# Altium PCB pcb.PcbDoc
Units mil, origin at the board's own origin, x right, y up, seen from the top; angles counter-clockwise.
Board outline 6000 x 4000 mil, 2 copper layers (Top Layer, Bottom Layer); 21 components, 35 nets, 121 pads, 11 vias.
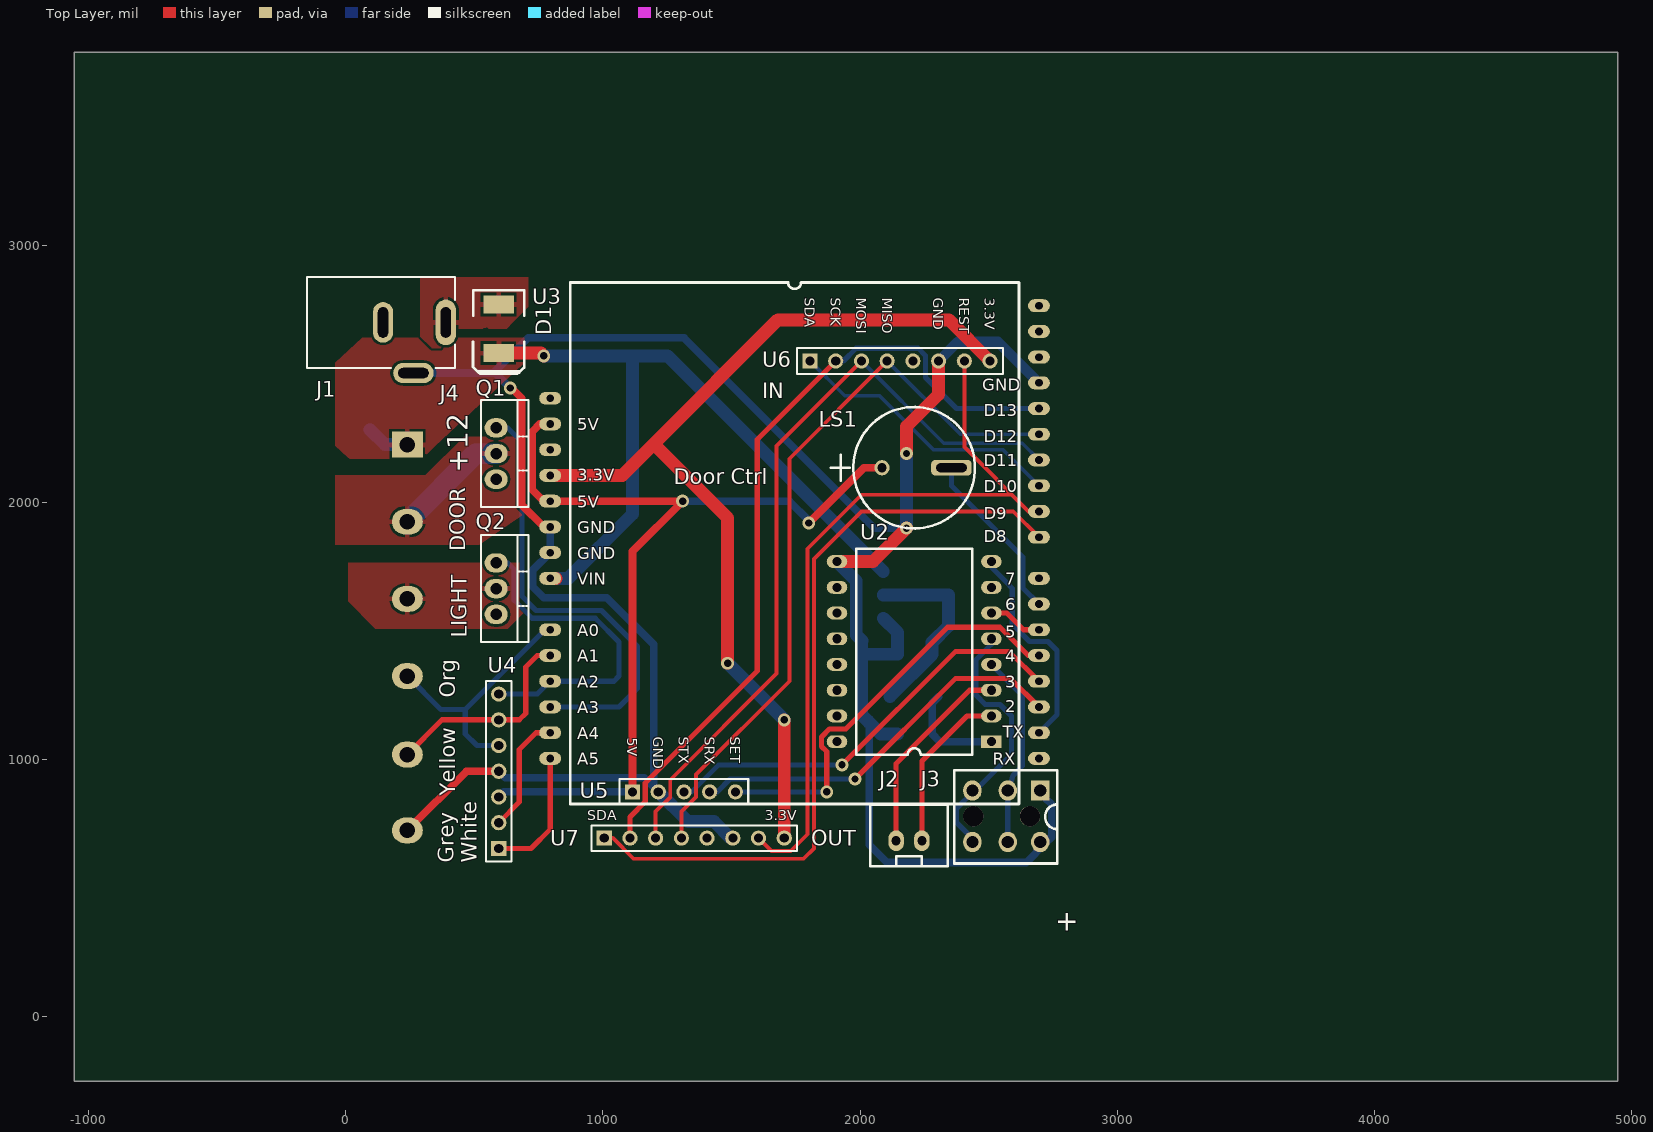
[diagram p0: Top Layer view]
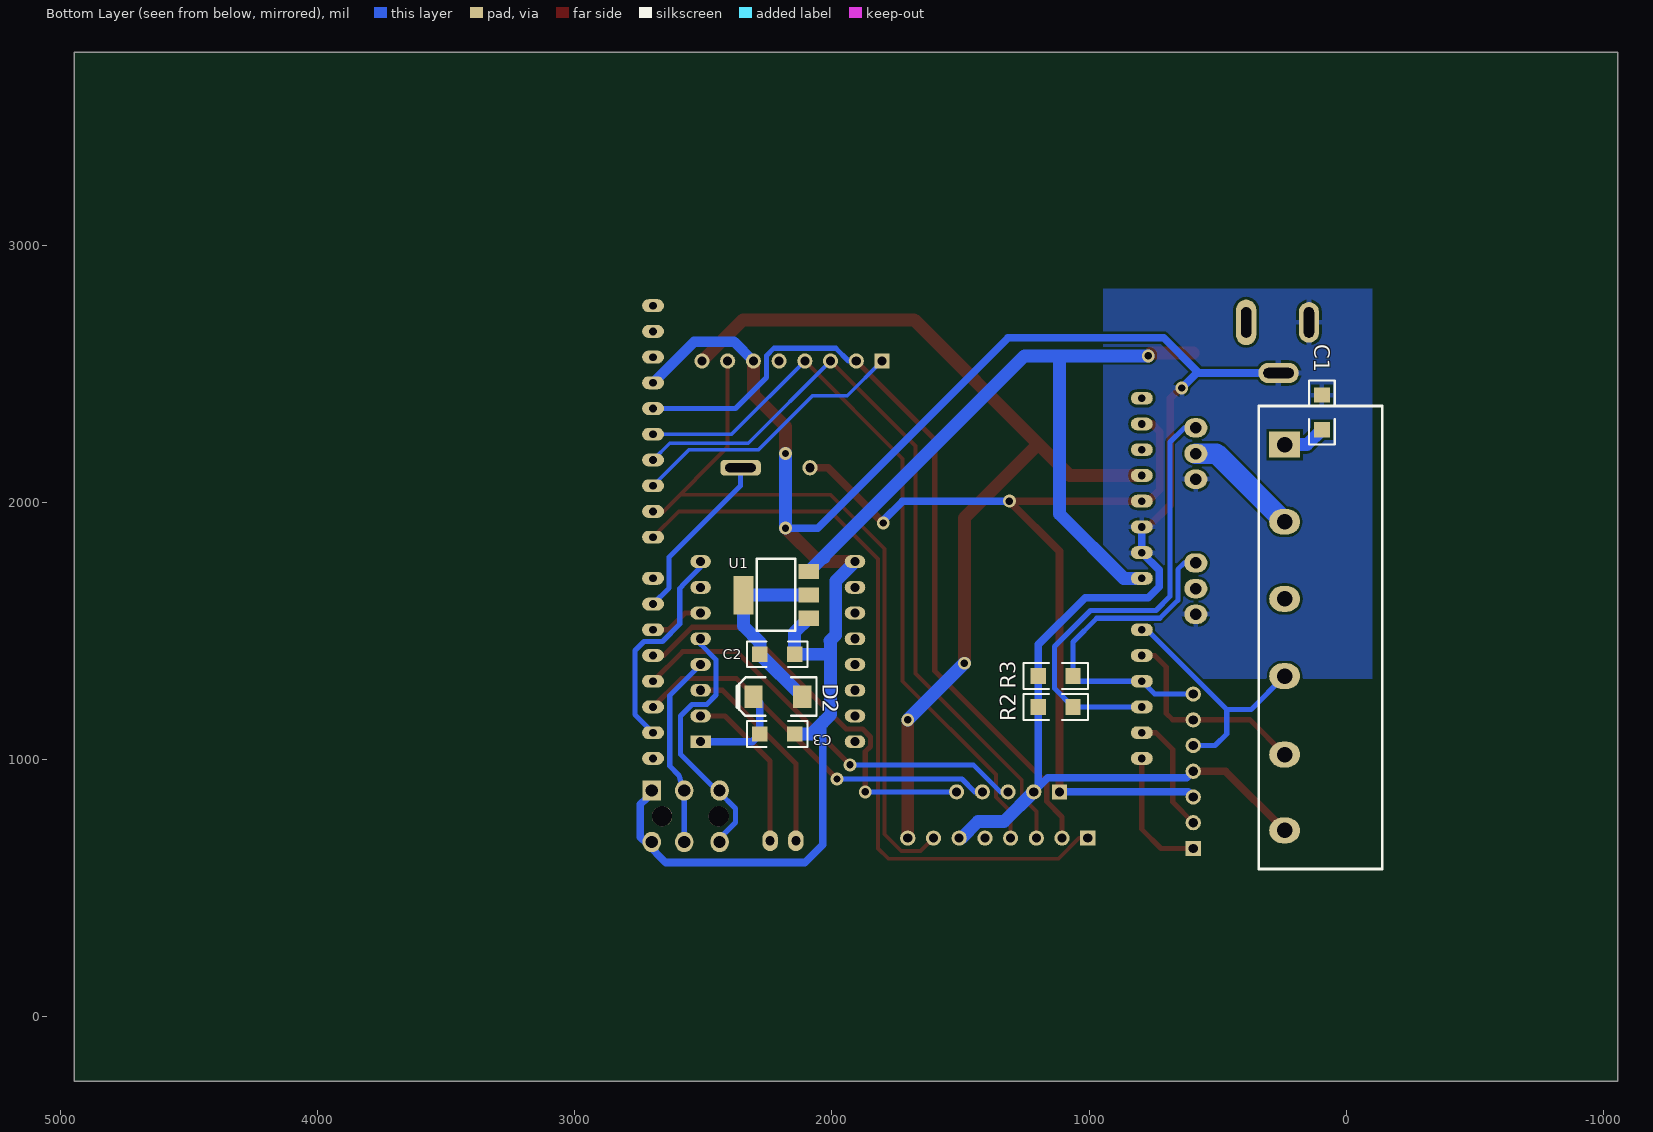
[diagram p1: Bottom Layer view, seen from below]

## Layer stack, top to bottom
Top Solder: solder mask 0.4, Solder Resist, Dk 3.5
Top Layer: signal copper 1.4
Dielectric 1: dielectric 12.6, FR-4, Dk 4.8
Bottom Layer: signal copper 1.4
Bottom Solder: solder mask 0.4, Solder Resist, Dk 3.5

## Board outline
-1055,-250 4945,-250 4945,3750 -1055,3750

## Design rules (kind name [scope] priority, off if disabled: settings)
Clearance Clearance_AC [(InNet('COM') OR InNet('NO') OR InNet('NC'))] p1: gap=30
Clearance [All] p2: gap=10
ComponentClearance ComponentClearance_1 [(InComponent('U3') OR InComponent('U7'))] p1: gap=0 collisioncheckmode=3 verticalgap=0 showdistances=TRUE
ComponentClearance [All] p2: gap=10 collisioncheckmode=3 verticalgap=10 showdistances=TRUE
HoleSize [All] p1: absolutevalues=TRUE maxlimit=200 minlimit=1 maxpercent=80.000 minpercent=20.000
PlaneConnect [All] p1: planeconnectstyle=Relief reliefexpansion=20 reliefentries=4 reliefconductorwidth=20 reliefairgap=20
PolygonConnect [All] p1: connectstyle=Relief reliefconductorwidth=20 reliefentries=4 polygonreliefangle="90 Angle" airgapwidth=10
RoutingVias [All] p1: holewidth=28 width=50 viastyle="Through Hole" minholewidth=28 minwidth=50 maxholewidth=28 maxwidth=50
SilkToSolderMaskClearance [IsPad] p1: minsilkscreentomaskgap=5 clearancetoexposedcopper=TRUE
SolderMaskExpansion [All] p1: expansion=4
Width [All] p1: maxlimit=196.85 minlimit=10 preferedwidth=10
25 further rules are at their usual default settings.

## Components (designator, comment, footprint, x,y, rotation, side; value= is the part's Value field where it differs from the comment)
C1 "" 1206#1 95,2350 r270 bottom
C2 "Cap Semi" 1206#2 2145,1410 r0 bottom
C3 "Cap Semi" 1206#2 2145,1100 r0 bottom
D1 "SS24" SMB 595,2675 r270 top
D2 "M7" SMA 2210,1245 r0 bottom
J1 "PWR2.5" KLD-0202_new -150,2700 r0 top
J2 "SPK" DG1282 2040,325 r0 top
J3 "earphone_jack" Phone-Jack 2700,880 r270 top
J4 "CON6" "POWER CONN6" 240,2225 r270 top
LS1 "Buzzer" BUZZ 2085,2135 r0 top
Q1 "IRF510" TO-220 585,2190 r270 top
Q2 "IRF510" TO-220 585,1665 r270 top
R2 "10k" 1206#1 1130,1205 r0 bottom
R3 "10k" 1206#1 1130,1325 r0 bottom
U1 "REG1117-5V" SOT223 2090,1550 r90 bottom
U2 "MP3" MP3 2510,1070 r180 top
U3 "Uno_part" UNO 795,1005 r0 top
U4 "ADDR_SET" HDR1X7 595,655 r90 top
U5 "WireLess433" HDR1X5 1115,875 r0 top
U6 "RC522" HDR1X8 1805,2550 r0 top
U7 "RC522" HDR1X8 1005,695 r0 top

## Footprints (in the part's own frame and the unit in brackets; to place one, negate y for a bottom-side part, rotate by r counter-clockwise, add the part's x,y. Pads: shape width x height; smd on the part's side, far side on the other; paste and mask are expansions set on the pad)
1206#1 [mm]
  rect 1.5x1.6 smd: 1(-1.71,0) 2(1.71,0)
  silkscreen extent -3.18,-1.27 3.18,1.27
1206#2 [mm]
  rect 1.524x1.524 smd: 1(0,0) 2(3.429,0)
  silkscreen extent -1.27,-1.27 4.7,1.27
BUZZ [mm] "6~8mm"
  round 1.5 hole 0.9: 1(0,0)
  rrect50% 4x1.524 hole 0.9 slot 3 at 0 deg: 2(6.858,0)
  silkscreen extent -5.08,-6 9.18,6
DG1282 [mil]
  oval 60x80 hole 35.43: 1(100,360) 2(200,360)
  silkscreen extent 0,260 300,500
HDR1X5 [mm] "Connector; Header; 5 Position"
  rect 1.5x1.5 hole 0.9: 1(0,0)
  round 1.5 hole 0.9: 2(2.54,0) 3(5.08,0) 4(7.62,0) 5(10.16,0)
  silkscreen extent -1.27,-1.27 11.43,1.27
HDR1X7 [mm] "Connector; Header; 7 Position"
  rect 1.5x1.5 hole 0.9: 1(0,0)
  round 1.5 hole 0.9: 2(2.54,0) 3(5.08,0) 4(7.62,0) 5(10.16,0) 6(12.7,0) 7(15.24,0)
  silkscreen extent -1.27,-1.27 16.51,1.27
HDR1X8 [mm] "Connector; Header; 8 Position"
  rect 1.5x1.5 hole 0.9: 1(0,0)
  round 1.5 hole 0.9: 2(2.54,0) 3(5.08,0) 4(7.62,0) 5(10.16,0) 6(12.7,0) 7(15.24,0) 8(17.78,0)
  silkscreen extent -1.27,-1.27 19.05,1.27
KLD-0202_new [mm] "DC Power Jack, 2.5mm, KLD Series, PCB Mount"
  oval 2x4.5 hole 1 slot 3 at 90 deg: 1(13.7,0)
  oval 2x4 hole 1 slot 3 at 90 deg: 2(7.5,0)
  oval 4x2 hole 1 slot 3 at 0 deg: 3(10.5,-5)
  silkscreen extent 0,-4.5 14.6,4.5
MP3 [mil]
  rect 80x50 hole 35.43: 1(0,0)
  oval 80x50 hole 35.43: 2(0,-100) 3(0,-200) 4(0,-300) 5(0,-400) 6(0,-500) 7(0,-600) 8(0,-700) 9(600,-700) 10(600,-600) 11(600,-500) 12(600,-400) 13(600,-300) 14(600,-200) 15(600,-100) 16(600,0)
  silkscreen extent 75,-750 525,50
Phone-Jack [mm]
  round 2 hole 2: 0(2.54,-1.016) 0(2.54,-6.604)
  rect 2x1.8 hole 1.2: 1(0,0)
  oval 2x1.8 hole 1.2: 1(5.08,0) 2(0,-3.2) 2(5.08,-3.2) 3(0,-6.7) 3(5.08,-6.7)
  silkscreen extent -2,-8.5 7.2,1.7
"POWER CONN6" [mil]
  rect 100x120 hole 60: 1(0,0)
  oval 100x120 hole 60: 2(300,0) 3(600,0) 4(900,0) 5(1205,0) 6(1500,0)
SMA [mm]
  rect 1.8x2.2 smd: A(-2.4,0) K(2.4,0)
  silkscreen extent -3.81,-1.91 4.06,1.91
SMB [mm]
  rect 1.8x3 smd: A(-2.4,0) K(2.4,0)
  silkscreen extent -3.81,-2.54 4.44,2.54
SOT223 [mil]
  rect 59x79 smd: 1(0,0) 2(90.55,0) 3(181.1,0)
  rect 150x79 smd: 4(89.88,253.54)
  silkscreen extent -49,52 231,202
TO-220 [mil]
  oval 75x90 hole 45: 1(-100,0) 2(0,0) 3(100,0)
  silkscreen extent -208,-58 208,125
UNO [mil]
  oval 85x50 hole 30: 1(0,1400) 2(0,1300) 3(0,1200) 4(0,1100) 5(0,1000) 6(0,900) 7(0,800) 8(0,700) 9(0,500) 10(0,400) 11(0,300) 12(0,200) 13(0,100) 14(0,0) 15(1900,0) 16(1900,100) 17(1900,200) 18(1900,300) 19(1900,400) 20(1900,500) 21(1900,600) 22(1900,700) 23(1900,860) 24(1900,960) 25(1900,1060) 26(1900,1160) 27(1900,1260) 28(1900,1360) 29(1900,1460) 30(1900,1560) 31(1900,1660) 32(1900,1760)
  silkscreen extent 78,-177 1822,1850

## Part data
C1: library part "Cap Semi", "Capacitor (Semiconductor SIM Model)"
C2 C3: "Capacitor (Semiconductor SIM Model)"
D1 D2: library part "Diode 1N4001", "1 Amp General Purpose Rectifier"
J1: "Low Voltage Power Supply Connector"
J2: library part CON2
J3: library part "Header 3", "Header, 3-Pin"
J4: "Connector"
LS1: "Magnetic Transducer Buzzer"
Q1 Q2: "HEXFET N-Channel Power MOSFET"
R2 R3: library part RES1
U1: library part REG1117-2.85, "800mA and 1A Low Dropout Positive Regulator 2.85V, 3.3V, 5V, and Adjustable"

## Via types
v1: diameter 50, hole 28, Top Layer to Bottom Layer, 11 vias

## Nets (pads, with @x,y where several pads share a name; then routed paths per layer and width w, separated by ;. In a path a pad name is that pad's centre, name@x,y a point inside that pad or via, vN(x,y) a via of type N, cw(c..) or ccw(c..) an arc to the next point about the centre after c; other vN are vias at no path point)
3.3V: U3.4 U6.8 U7.8 | length 3769.6
  Top Layer w50: U3.4 1075,2105 1197.5,2227.5 ; v1(1485,1375) 1485,1940 1197.5,2227.5 ; U7.8 v1(1705,1155) ; U6.8 2345,2710 1680,2710 1197.5,2227.5
  Bottom Layer w50: v1(1485,1375) v1(1705,1155)
5V: LS1.1 U3.2 U3.5 U4.3 U5.1 | length 3545.2
  Top Layer w30: U3.2 755,2305 725,2275 725,2050 770,2005 U3.5 v1(1310,2005) 1115,1810 U5.1 ; v1(1800,1920) 2015,2135 LS1.1
  Bottom Layer w30: U4.3 615,875 905,875 U5.1 ; v1(1310,2005) 1725,2005 v1@1800,1930
12V: D1.A J1.1
A0: J4.4 U3.9 U4.5 | length 980.9
  Bottom Layer w20: J4.4 370,1195 464.96,1195 ; U4.5 510,1055 464.96,1100.04 464.96,1195 ; U3.9 774.96,1505 574.49,1304.53 464.96,1195
A1: J4.5 U3.10 U4.6 | length 819.9
  Top Layer w20: J4.5 375,1155 U4.6 675,1155 700,1180 700,1360 745,1405 U3.10
A2: Q2.1 R3.1 U3.11 U4.7 | length 1304.4
  Bottom Layer w20: Q2.1 630,1765 655,1740 655,1620 725,1550 970,1550 1062.68,1457.32 R3.1 1042.68,1305 U3.11 745,1255 U4.7
A3: Q1.1 R2.1 U3.12 | length 1786.2
  Bottom Layer w20: Q1.1 630,2290 685,2235 685,1635 740,1580 995,1580 1135,1440 1135,1277.32 R2.1 U3.12
A4: U3.13 U4.2 | length 465.1
  Top Layer w20: U4.2 675,835 675,1040 740,1105 U3.13
A5: U3.14 U4.1 | length 506.1
  Top Layer w20: U4.1 720,655 795,730 U3.14
D0: U3.15
D1: U2.8 U3.16 | length 841.3
  Bottom Layer w20: U2.8 2510,1748.64 2580,1678.64 2580,1677.57 2591.57,1666.01 2591.57,1527.29 2658.86,1460 2730,1460 2765,1425 2765,1175 U3.16
D2: U3.17 U5.4 | length 1508.5
  Top Layer w20: v1(1979.53,924.53) 2370,1315 2585,1315 U3.17
  Bottom Layer w20: U5.4 1444.96,875 1494.49,924.53 v1(1979.53,924.53) v1@1980,925
D3: U3.18 U5.3 | length 1653.4
  Top Layer w20: v1(1930,980) 2370,1420 2580,1420 U3.18
  Bottom Layer w20: U5.3 1344.96,875 1449.96,980 v1(1930,980)
D4: U3.19 U5.5 | length 1644.1
  Top Layer w20: v1(1870,875) 1870,1031.36 1850,1051.36 1850,1088.64 1881.36,1120 1945,1120 2340,1515 2543.64,1515 2653.64,1405 U3.19
  Bottom Layer w20: U5.5 v1(1870,875)
D5: U2.6 U3.20 | length 211.9
  Top Layer w20: U2.6 2570,1570 2635,1505 U3.20
D6: LS1.2 U3.21 | length 670.8
  Bottom Layer w20: LS1.2 2355,2065 2632.5,1787.5 2632.5,1667.5 U3.21
D7: U3.22
D8: U3.23 U7.1 | length 2982.8
  Top Layer w15: U7.1 1038.49,695 1118.49,615 1780,615 1820,655 1820,1780 2005,1965 2595,1965 U3.23
D9: U3.24 U6.7 U7.7 | length 3070.1
  Top Layer w15: U7.7@1625,695 U7.7 1655,645 1730,645 1795,710 1795,1820 2005,2030 2590,2030 U3.24@2655,1965 ; U6.7 2405,2215 U3.24@2655,1965 ; U3.24 U3.24@2655,1965
D10: U3.25 U6.1 | length 1090.9
  Bottom Layer w15: U6.1 1940,2415 2075,2415 2285,2205 2555,2205 U3.25
D11: U3.26 U6.3 U7.3 | length 3035.8
  Top Layer w15: U7.3 1205,798.49 1262.03,855.52 1262.03,922.03 1675,1335 1675,2220 U6.3
  Bottom Layer w15: U6.3 2325,2230 2630,2230 U3.26
D12: U3.27 U6.4 U7.4 | length 2894.4
  Top Layer w15: U7.4 1305,798.49 1362.03,855.52 1362.03,942.03 1725,1305 1725,2170 U6.4
  Bottom Layer w15: U6.4 2390,2265 U3.27
D13: U3.28 U6.2 U7.2 | length 3143.8
  Top Layer w20: U7.2 1105,777.66 1164.53,837.19 1164.53,909.53 1600,1345 1600,2245 U6.2
  Bottom Layer w20: U6.2 1934.96,2550 1984.49,2599.53 2225.52,2599.53 2254.53,2570.52 2254.53,2485.47 2375,2365 U3.28
DAC-L: J3.3 U2.5 | length 1060.5
  Bottom Layer w20: J3.3@2433.64,866.36 2588.64,1021.36 2588.64,1170 2543.64,1215 2486.36,1215 2450,1251.36 2450,1388.64 2510,1448.64 U2.5 ; J3.3@2456.22,675 2375,756.22 2375,810 2440,875 J3.3@2456.22,875
DAC-R: J3.2 U2.4 | length 762.7
  Bottom Layer w20: U2.4 2630,1250 2630,975 2594.02,939.02 2574.02,875 J3.2@2574.02,675
GND: C1.1 C2.1 C3.1 J1.2 J1.3 J3.1 J4.6 Q1.3 Q2.3 R2.2 R3.2 U1.1 U2.9 U3.6 U3.7 U3.29 U4.4 U5.2 U6.6 U7.6 | length 9899.9
  Top Layer w30: J4.6 470,955 U4.4 ; v1@640,2450 685,2405 685,1990 770,1905 U3.6
  Top Layer w50: U2.9 2050,1770 v1(2180,1900) ; v1(2180,2190) 2180,2295 2305,2420 U6.6
  Bottom Layer w30: J1.3 573.15,2503.15 710,2640 1315,2640 2055,1900 v1(2180,1900) ; 581.85,2503.15 v1(640,2445) ; U4.4 620,930 1160,930 U5.2@1197.32,892.68 ; U3.6 U3.7 727.5,1737.5 727.5,1672.5 770,1630 1015,1630 1197.32,1447.68 R3.2 R2.2 U5.2@1197.32,892.68 ; U5.2 U5.2@1197.32,892.68 ; 2030,1150 2035,1145 2035,740 2035,670 2105,600 2645,600 2720,675 2744.37,699.37 2744.37,826.03 2720,850.4 J3.1@2720,875
  Bottom Layer w40: U6.6 2380,2625 2535,2625 U3.29
  Bottom Layer w50: U5.2 1330.47,759.53 1431.73,759.53 1496.26,695 U7.6 ; U2.9 1910,1769.85 1985,1694.85 1985,1485 2007.5,1462.5 2005,1460 2005,1400 ; 2030,1150 2005,1175 2005,1400 ; 2035,1145 2080,1100 C3.1 ; U1.1 2145,1495 C2.1 2015,1410 2005,1400 ; v1(2180,1900) v1(2180,2190)
NetC2_2: C2.2 D2.A U1.2 U1.4 | length 743.2
  Bottom Layer w50: U1.2 2342.88,1640.55 U1.4 2343.54,1520 2280,1456.46 C2.2 2115.51,1245.51 D2.A
NetJ2_1: J2.1 U2.3 | length 788.1
  Top Layer w20: J2.1 2140,985 2425,1270 U2.3
NetJ2_2: J2.2 U2.2 | length 652.5
  Top Layer w20: J2.2 2240,995 2415,1170 U2.2
NetJ4_2: J4.2 Q1.2 | length 454.8
  Bottom Layer w80: J4.2 505,2190 Q1.2
NetJ4_3: J4.3 Q2.2
SCL: U3.32
SDA: U3.31
VCC_MP3: C3.2 D2.K U2.1 | length 397.6
  Bottom Layer w30: D2.K 2280,1220.51 C3.2 2310,1070 U2.1
VIN: C1.2 D1.K J4.1 U1.3 U3.8 | length 3077.5
  Top Layer w50: D1.K 759.49,2580.51 v1(770,2570) ; U3.8 U3.8@817.16,1705
  Bottom Layer w50: C1.2 152.68,2225 J4.1 ; v1(770,2570) 1251.1,2570 U1.3 ; U3.8 865,1705 1115,1955 1115,2565 ; 2030,1785 2036.1,1785
pads on no net: J3.0 U2.7 U2.10 U2.11 U2.12 U2.13 U2.14 U2.15 U2.16 U3.1 U3.3 U3.30 U6.5 U7.5

## Polygon pours and split planes (outlines as drawn)
NetJ4_2 on Top Layer "Top Layer-No Net" (solid, pour order 10): -40,1835 519.74,1835 637.02,1916.48 685,1949.81 685,2235 650,2255 460,2255 310,2105 -40,2105
NetJ4_3 on Top Layer "Top Layer-No Net" (solid, pour order 12): 10,1765 10,1615 110,1515 115,1510 580,1510 630,1510 690,1570 675,1585 675,1765
VIN on Top Layer "Top Layer-No Net" (solid, pour order 6): -40,2374.75 -40,2230.49 -40,2221.19 10,2174.65 15,2170 295,2170 345,2216.53 695,2542.28 695,2640 65,2640 -40,2542.28
12V on Top Layer "Top Layer-No Net" (solid, pour order 2): 290,2685 290,2810 290,2875 710,2875 710,2760 650,2700 625,2675 530,2675 495,2675 450,2630 420,2600 350,2600 335,2600 290,2645
GND on Bottom Layer "Top Layer-No Net" (solid, remove dead copper, pour order 16): -100,2830 -100,1315 730,1315 880,1465 945,1530 945,2830

## Silkscreen, mask and mechanical layers (free items; w line width, h text height)
Top Overlay:
  text "SDA" at 1785,2795 h40 r270
  text "SCK" at 1885,2795 h40 r270
  text "MOSI" at 1985,2795 h40 r270
  text "MISO" at 2085,2795 h40 r270
  text "GND" at 2285,2795 h40 r270
  text "REST" at 2385,2795 h40 r270
  text "3.3V" at 2485,2795 h40 r270
  text "IN" at 1620,2405 h60
  text "+12" at 475,2115 h80 r90
  text "Door Ctrl" at 1275,2070 h60
  text "DOOR" at 465,1810 h60 r90
  text "LIGHT" at 470,1475 h60 r90
  text "Org" at 425,1240 h60 r90
  text "GND" at 1195,1090 h40 r270
  text "STX" at 1295,1090 h40 r270
  text "SRX" at 1395,1090 h40 r270
  text "SET" at 1495,1090 h40 r270
  text "5V" at 1095,1085 h40 r270
  text "Yellow" at 425,860 h60 r90
  text "SDA" at 940,765 h40
  text "3.3V" at 1630,765 h40
  text "OUT" at 1810,665 h60
  text "Grey" at 420,600 h60 r90
  text "White" at 510,600 h60 r90
  text "+" at 2850,335 h80
Mechanical 1:
  lines w10: -150,575 2800,575 2800,2875 -150,2875 ; -150,580 -150,2880

## Dimensions
2800,575 to 2800,2875 on Top Overlay
-150,580 to 2800,575 on Top Overlay

## Text inside footprints (layer, text, board x,y; h text height)
U3: Top Overlay "5V" at 900,2280 h47.24; Top Overlay "3.3V" at 900,2085 h47.24; Top Overlay "5V" at 900,1980 h47.24; Top Overlay "GND" at 900,1880 h47.24; Top Overlay "GND" at 900,1780 h47.24; Top Overlay "VIN" at 900,1680 h47.24; Top Overlay "A0" at 900,1480 h47.24; Top Overlay "A1" at 900,1380 h47.24; Top Overlay "A2" at 900,1280 h47.24; Top Overlay "A4" at 900,1080 h47.24; Top Overlay "A5" at 900,980 h47.24; Top Overlay "A3" at 900,1180 h47.24; Top Overlay "RX" at 2515,980 h47.24; Top Overlay "TX" at 2555,1085 h47.24; Top Overlay "2" at 2565,1185 h47.24; Top Overlay "3" at 2565,1280 h47.24; Top Overlay "4" at 2565,1380 h47.24; Top Overlay "5" at 2565,1475 h47.24; Top Overlay "6" at 2565,1580 h47.24; Top Overlay "7" at 2565,1680 h47.24; Top Overlay "D8" at 2480,1845 h47.24; Top Overlay "D9" at 2480,1935 h47.24; Top Overlay "D10" at 2480,2040 h47.24; Top Overlay "D11" at 2480,2140 h47.24; Top Overlay "D12" at 2480,2235 h47.24; Top Overlay "D13" at 2480,2335 h47.24; Top Overlay "GND" at 2475,2435 h47.24